# Altium PCB SPI-主板-开关.PcbDoc (part 2 of 11)
Units mm, origin at the board's own origin, x right, y up, seen from the top; angles counter-clockwise.
Board outline 97.69 x 103.45 mm, 2 copper layers (Top Layer, Bottom Layer); 86 components, 63 nets, 260 pads, 250 vias.
Unrouted connection lines stored in the file: 6.
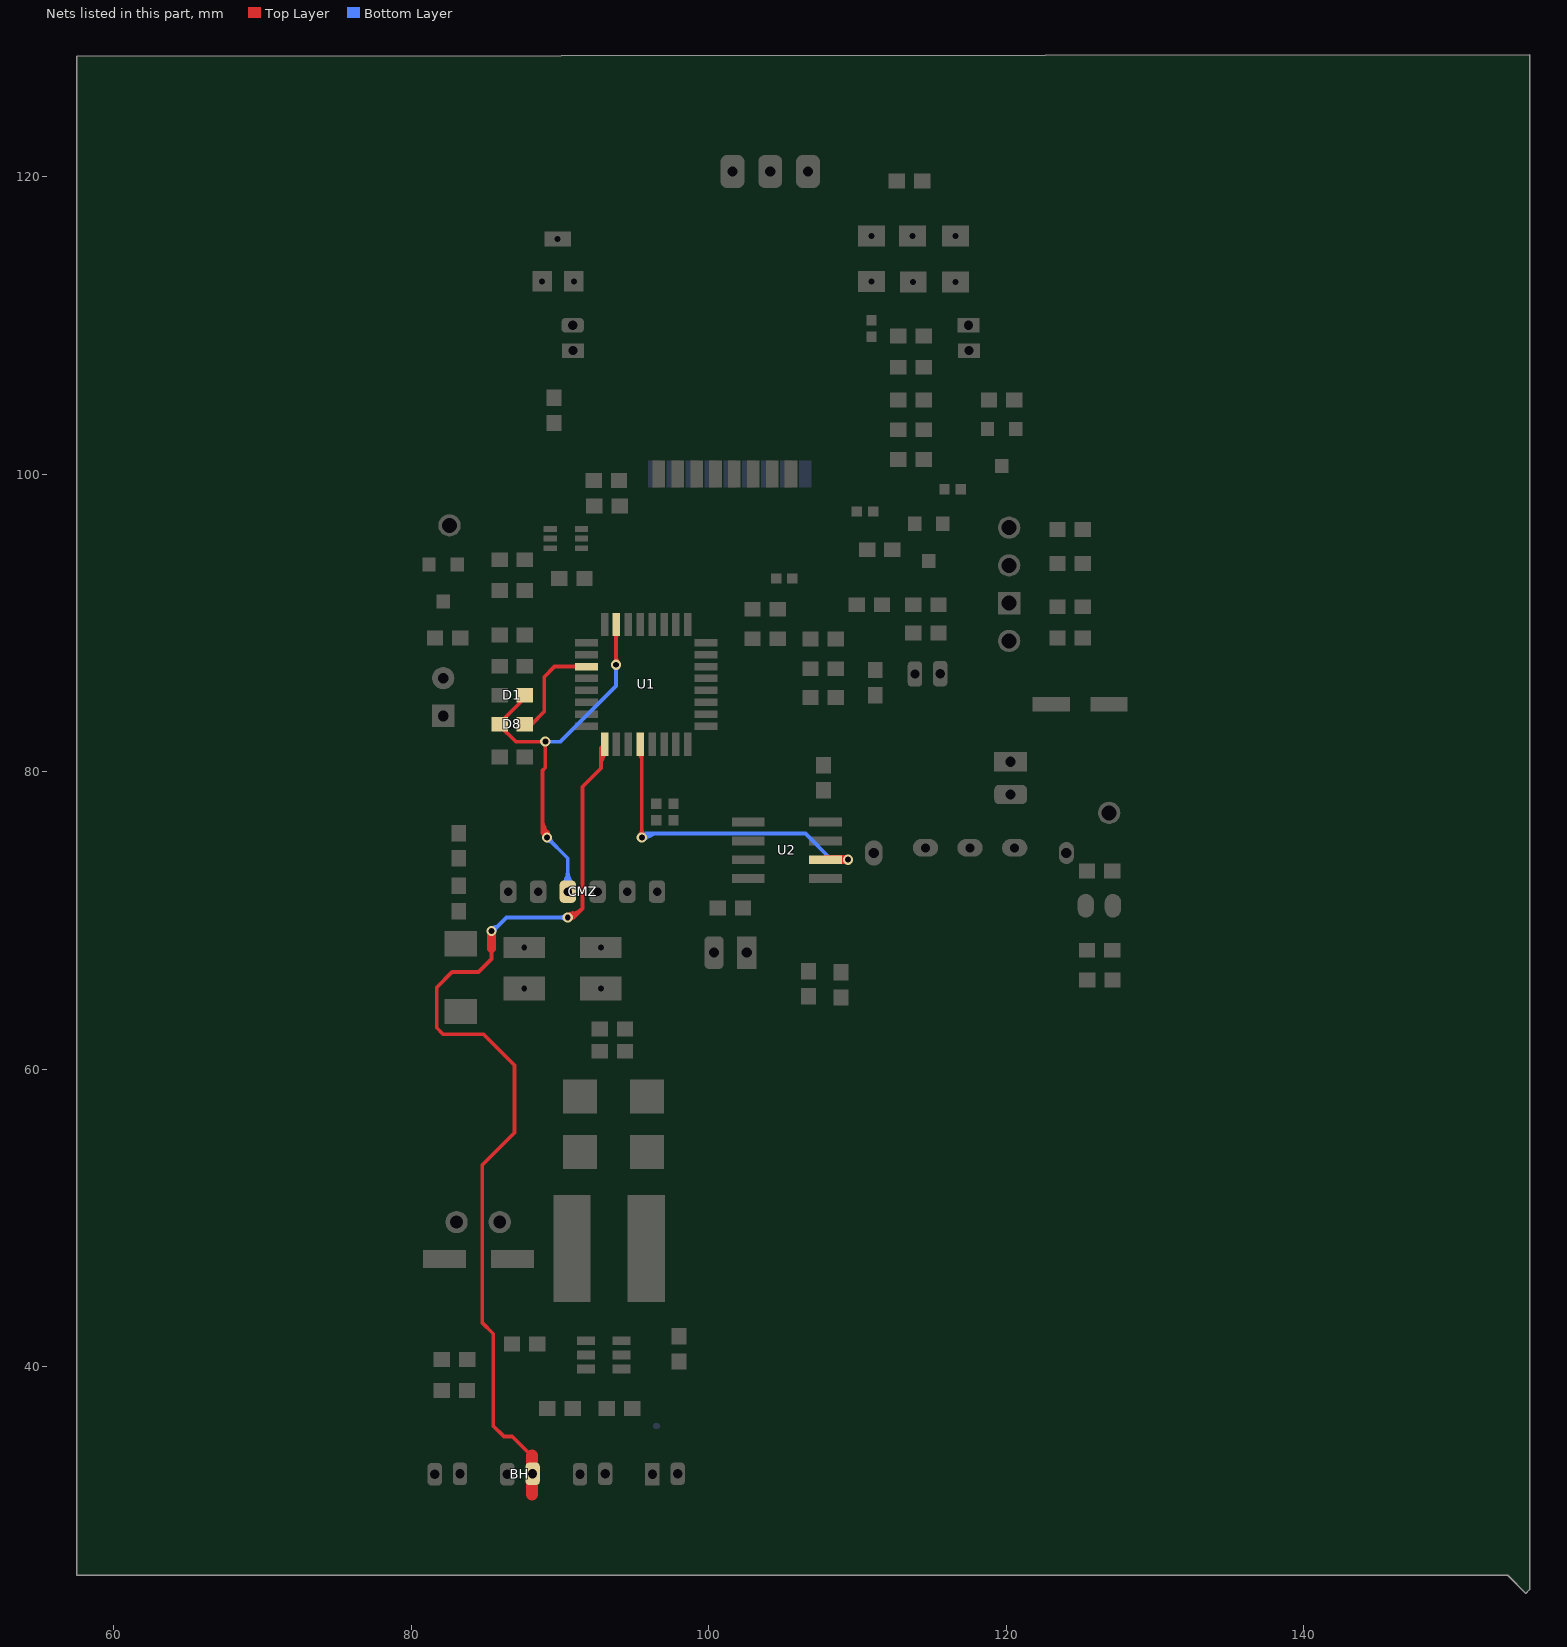
[diagram p2: the nets of this part, all layers, seen from the top]

## Via types
v1: diameter 0.9, hole 0.5, Top Layer to Bottom Layer, 104 vias
v2: diameter 0.68, hole 0.4, Top Layer to Bottom Layer, 100 vias
v3: diameter 1.1, hole 0.6, Top Layer to Bottom Layer, tented both sides, 16 vias
v4: diameter 1, hole 0.8, Top Layer to Bottom Layer, tented both sides, 8 vias
v5: diameter 1, hole 0.6, Top Layer to Bottom Layer, 4 vias
v6: diameter 0.8, hole 0.5, Top Layer to Bottom Layer, 4 vias
v7: diameter 0.7, hole 0.4, Top Layer to Bottom Layer, 4 vias
v8: diameter 0.6, hole 0.4, Top Layer to Bottom Layer, 3 vias
v9: diameter 1.1, hole 0.68, Top Layer to Bottom Layer, 2 vias
v10: diameter 0.8, hole 0.4, Top Layer to Bottom Layer, 2 vias
v11: diameter 1, hole 0.5, Top Layer to Bottom Layer, 1 vias
v12: diameter 0.9, hole 0.6, Top Layer to Bottom Layer, tented bottom, 1 vias
v13: diameter 1.2, hole 0.68, Top Layer to Bottom Layer, 1 vias

## Nets (pads, with @x,y where several pads share a name; then routed paths per layer and width w, separated by ;. In a path a pad name is that pad's centre, name@x,y a point inside that pad or via, vN(x,y) a via of type N, cw(c..) or ccw(c..) an arc to the next point about the centre after c; other vN are vias at no path point) (continued)
AM: CMZ.5 D1.2 D8.1 U1.15 | length 48.2
  Top Layer w0.254: D8.1@86.004,83.058 87.033,82.029 v2(89.014,82.029) 89.014,80.277 88.824,80.086 88.824,75.895 ; D8.1@86.004,83.566 86.233,83.566 87.642,84.975 D1.2@87.642,85.15 ; v2(89.129,75.59) 88.824,75.895 ; v2(93.777,87.198) U1.15@93.777,89.902 ; 88.824,75.895 ccw(c89.057,76.128) v2@89.1,75.802 ; 88.824,75.895 cw(c88.591,75.662) v2@88.917,75.619 ; 88.824,75.895 ccw(c89.057,76.128) v2@89.1,75.802 ; 88.824,75.895 cw(c88.591,75.662) v2@88.917,75.619 ; 88.824,75.895 ccw(c89.057,76.128) v2@89.1,75.802 ; 88.824,75.895 cw(c88.591,75.662) v2@88.917,75.619 ; 88.824,76.227 ccw(c89.765,76.227) v2@89.1,75.561 ; 88.824,76.227 ccw(c89.765,76.227) v2@89.1,75.561 ; 88.824,76.227 ccw(c89.765,76.227) v2@89.1,75.561 ; 88.824,76.84 ccw(c90.379,76.84) v2@89.279,75.741 ; 88.824,76.84 ccw(c90.379,76.84) v2@89.279,75.741 ; 88.824,76.84 ccw(c90.379,76.84) v2@89.279,75.741 ; 88.844,76.003 ccw(c89.197,76.207) v2@89.152,75.802 ; 88.844,76.003 ccw(c89.197,76.207) v2@89.152,75.802 ; 88.844,76.003 ccw(c89.197,76.207) v2@89.152,75.802 ; 88.885,75.933 cw(c88.557,75.744) v2@88.923,75.646 ; 88.885,75.933 cw(c88.557,75.744) v2@88.923,75.646 ; 88.885,75.933 cw(c88.557,75.744) v2@88.923,75.646 ; 88.936,76.335 cw(c88.371,76.009) v2@88.942,75.693 ; 88.936,76.335 cw(c88.371,76.009) v2@88.942,75.693 ; 88.936,76.335 cw(c88.371,76.009) v2@88.942,75.693 ; 89.161,75.946 cw(c88.831,75.755) v2@89.164,75.571 ; 89.161,75.946 cw(c88.831,75.755) v2@89.164,75.571 ; 89.161,75.946 cw(c88.831,75.755) v2@89.164,75.571 ; 93.777,87.712 ccw(c94.291,87.712) v2@93.927,87.349 ; 93.777,87.712 ccw(c94.291,87.712) v2@93.927,87.349 ; 93.777,87.712 ccw(c94.291,87.712) v2@93.927,87.349 ; 93.777,89.024 cw(c94.153,89.024) U1.15@93.887,89.29 ; 93.777,89.024 cw(c94.153,89.024) U1.15@93.887,89.29 ; 93.777,89.024 cw(c94.153,89.024) U1.15@93.887,89.29
  Bottom Layer w0.254: v2(89.014,82.029) 90.03,82.029 93.777,85.776 v2(93.777,87.198) ; v2(89.129,75.59) 90.53,74.189 CMZ.5@90.53,71.944 ; 89.492,75.227 ccw(c89.129,74.863) 89.129,75.377 cw(c89.129,74.863) 89.492,75.227 ; 89.492,75.227 cw(c89.856,75.59) 89.342,75.59 ccw(c89.856,75.59) 89.492,75.227 ; 90.53,73.286 ccw(c91.672,73.286) 90.864,72.478 cw(c91.672,73.286) 90.53,73.286 ; 90.53,73.286 cw(c89.388,73.286) 90.196,72.478 ccw(c89.388,73.286) 90.53,73.286 ; 93.777,86.792 cw(c94.058,86.792) v2@93.898,87.023 ; 93.777,86.792 cw(c94.058,86.792) v2@93.898,87.023 ; 93.777,86.792 cw(c94.058,86.792) v2@93.898,87.023
AM-D: D8.2 U1.19 | length 8.7
  Top Layer w0.254: D8.2@87.655,83.566 88.036,83.185 88.087,83.185 88.951,84.049 88.951,86.385 89.643,87.077 90.252,87.077 U1.19@91.775,87.077 ; 90.953,87.077 ccw(c90.953,87.374) U1.19@91.163,87.164 ; 90.953,87.077 cw(c90.953,86.781) U1.19@91.163,86.991 ; 90.953,87.077 ccw(c90.953,87.374) U1.19@91.163,87.164 ; 90.953,87.077 cw(c90.953,86.781) U1.19@91.163,86.991 ; 90.953,87.077 ccw(c90.953,87.374) U1.19@91.163,87.164 ; 90.953,87.077 cw(c90.953,86.781) U1.19@91.163,86.991
BH: BH.1 U1.25 | length 82.2
  Top Layer w0.254: 85.395,68.123 85.395,67.412 84.531,66.548 82.753,66.548 81.712,65.507 81.712,62.789 82.144,62.357 84.861,62.357 86.944,60.274 86.944,55.728 84.769,53.552 84.769,42.968 85.522,42.215 85.522,36.017 86.233,35.306 86.792,35.306 88.066,34.032 ; v2(90.526,70.206) 90.907,70.206 ; U1.25@93,81.853 92.761,81.613 92.761,80.239 91.516,78.994 91.516,70.815 ; v2@90.491,70.227 cw(c91.007,69.914) 90.863,70.5 ; v2@90.491,70.227 cw(c91.007,69.914) 90.863,70.5 ; v2@90.491,70.227 cw(c91.007,69.914) 90.863,70.5 ; v2@90.525,70.165 ccw(c90.541,70.948) 91.095,70.394 ; v2@90.525,70.165 ccw(c90.541,70.948) 91.095,70.394 ; v2@90.525,70.165 ccw(c90.541,70.948) 91.095,70.394 ; v2@90.53,70.419 ccw(c90.558,71.773) 91.516,70.815 ; v2@90.53,70.419 ccw(c90.558,71.773) 91.516,70.815 ; v2@90.53,70.419 ccw(c90.558,71.773) 91.516,70.815 ; v2@90.707,70.094 cw(c90.907,69.971) 90.907,70.206 ; v2@90.707,70.094 cw(c90.907,69.971) 90.907,70.206 ; v2@90.707,70.094 cw(c90.907,69.971) 90.907,70.206 ; v2@90.707,70.317 ccw(c90.907,70.44) 90.907,70.206 ; v2@90.707,70.317 ccw(c90.907,70.44) 90.907,70.206 ; v2@90.707,70.317 ccw(c90.907,70.44) 90.907,70.206 ; 90.907,70.206 91.516,70.815 ; 92.761,80.453 cw(c93.875,80.453) U1.25@93.087,81.241 ; 92.761,80.453 cw(c93.875,80.453) U1.25@93.087,81.241 ; 92.761,80.453 cw(c93.875,80.453) U1.25@93.087,81.241 ; 92.761,81.066 cw(c93.262,81.066) U1.25@92.907,81.42 ; 92.761,81.066 cw(c93.262,81.066) U1.25@92.907,81.42 ; 92.761,81.066 cw(c93.262,81.066) U1.25@92.907,81.42 ; 92.833,80.801 ccw(c92.313,81.101) U1.25@92.883,81.289 ; 92.833,80.801 ccw(c92.313,81.101) U1.25@92.883,81.289 ; 92.833,80.801 ccw(c92.313,81.101) U1.25@92.883,81.289
  Top Layer w0.6: 85.395,68.123 85.4,68.128 v2(85.4,69.291)
  Top Layer w0.8: 88.114,31.4 88.114,34.032
  Bottom Layer w0.254: v2@85.361,69.305 cw(c85.759,69.163) 85.65,69.571 ; v2(85.4,69.291) 85.496,69.291 86.411,70.206 v2@90.5,70.206 ; 90.011,70.206 ccw(c90.011,70.72) 90.375,70.356 cw(c90.011,70.72) 90.011,70.206 ; 90.011,70.206 cw(c90.011,69.691) 90.375,70.055 ccw(c90.011,69.691) 90.011,70.206 ; v2@85.4,69.504 ccw(c85.4,70.251) 85.928,69.723 cw(c85.4,70.251) v2@85.4,69.504 ; v2@85.613,69.291 cw(c85.894,69.291) 85.695,69.49 ccw(c85.894,69.291) v2@85.613,69.291
BI-R: U1.28 U2.2 | length 32.8
  Top Layer w0.254: U1.28@95.4,81.853 95.504,81.749 v2(95.504,75.59) ; U1.28@95.313,81.241 cw(c94.852,80.78) 95.504,80.78 ; U1.28@95.313,81.241 cw(c94.852,80.78) 95.504,80.78 ; U1.28@95.313,81.241 cw(c94.852,80.78) 95.504,80.78 ; v2@95.353,75.741 ccw(c94.99,76.105) 95.504,76.105 ; v2@95.353,75.741 ccw(c94.99,76.105) 95.504,76.105 ; v2@95.353,75.741 ccw(c94.99,76.105) 95.504,76.105 ; 95.447,81.008 cw(c95.608,81.1) U1.28@95.483,81.237 ; 95.447,81.008 cw(c95.608,81.1) U1.28@95.483,81.237 ; 95.447,81.008 cw(c95.608,81.1) U1.28@95.483,81.237 ; 95.504,76.105 ccw(c96.018,76.105) v2@95.655,75.741 ; 95.504,76.105 ccw(c96.018,76.105) v2@95.655,75.741 ; 95.504,76.105 ccw(c96.018,76.105) v2@95.655,75.741
  Top Layer w0.6: U2.2@107.854,74.092 v2(109.372,74.092)
  Bottom Layer w0.254: v2(95.504,75.59) 95.758,75.844 106.502,75.844 108.255,74.092 v2(109.372,74.092) ; v2@95.628,75.764 ccw(c95.919,76.174) 96.171,75.738 ; 108.858,74.092 ccw(c108.858,74.606) 109.222,74.242 cw(c108.858,74.606) 108.858,74.092 ; 108.858,74.092 cw(c108.858,73.578) 109.222,73.941 ccw(c108.858,73.578) 108.858,74.092 ; v2@95.475,75.619 cw(c96.018,75.076) 96.018,75.844 ccw(c96.018,75.076) v2@95.475,75.619 ; v2@95.655,75.44 cw(c96.631,74.463) 96.631,75.844 ccw(c96.631,74.463) v2@95.655,75.44